# Altium PCB pqm_v2_copia01.PcbDoc
Units mil, origin at the board's own origin, x right, y up, seen from the top; angles counter-clockwise.
Board outline 5393.7 x 3307.09 mil, 2 copper layers (Top Layer, Bottom Layer); 201 components, 141 nets, 786 pads, 24 vias.
Unrouted connection lines stored in the file: 311.
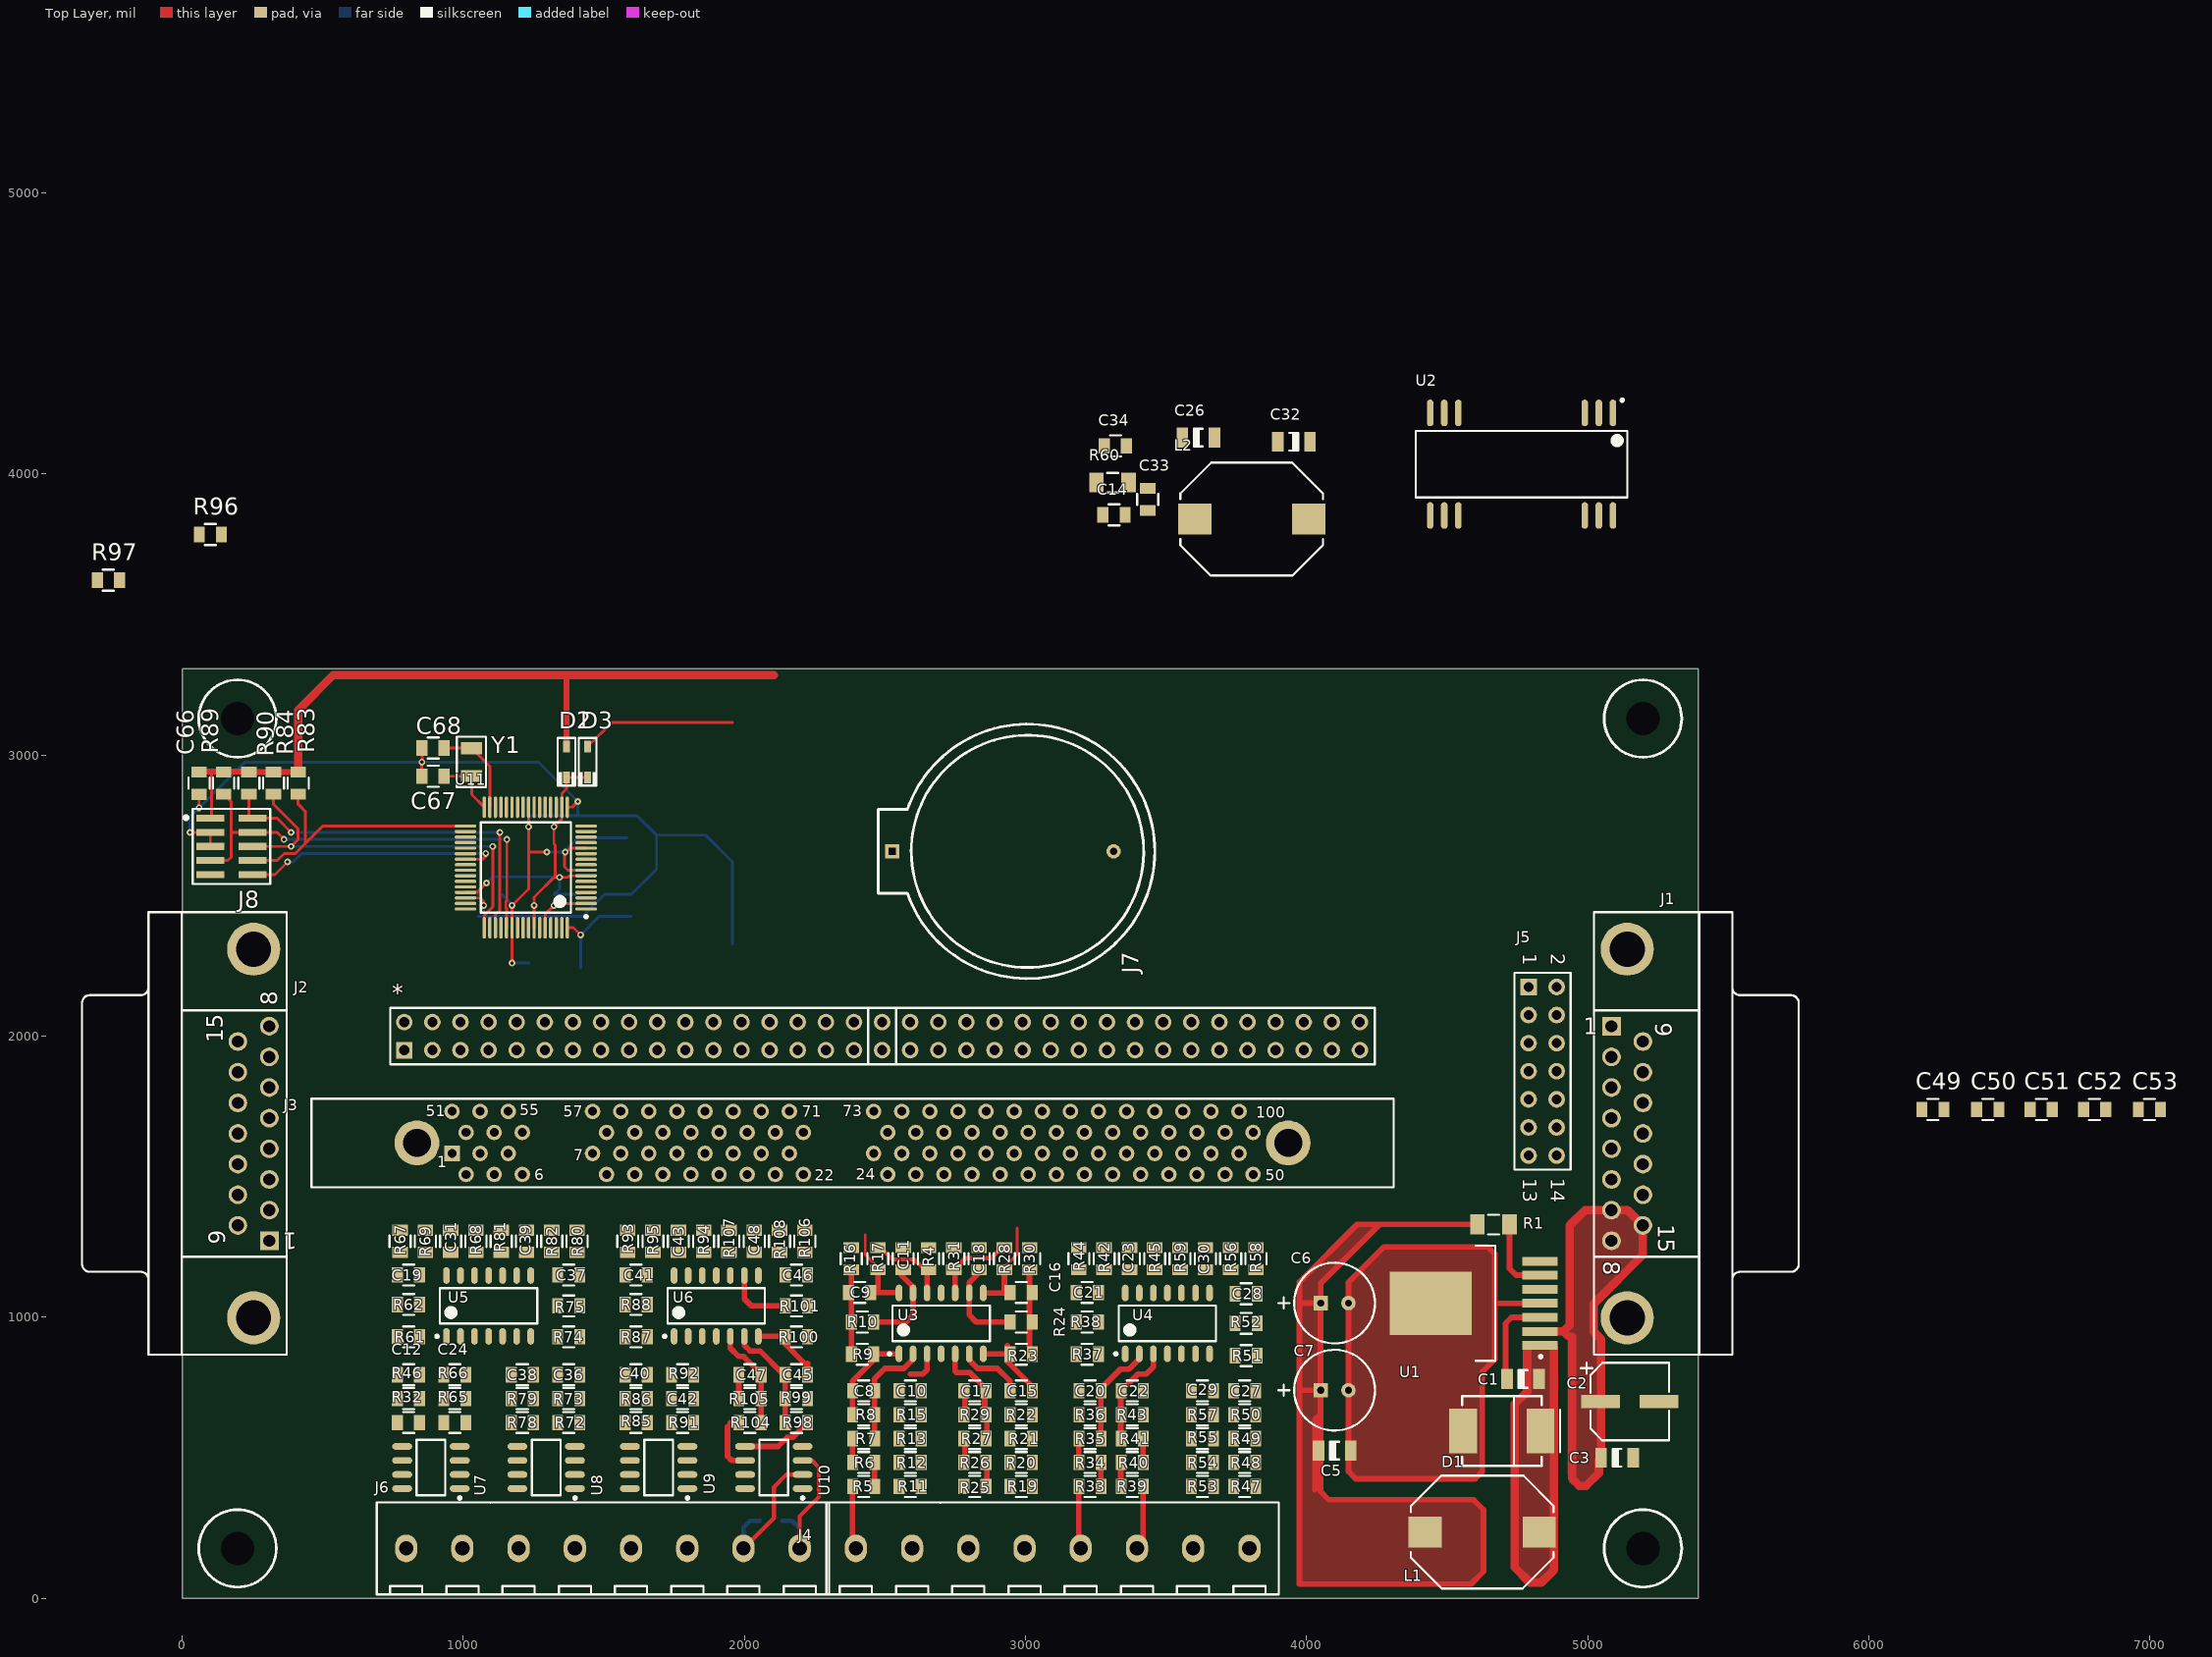
[diagram p0: Top Layer view]
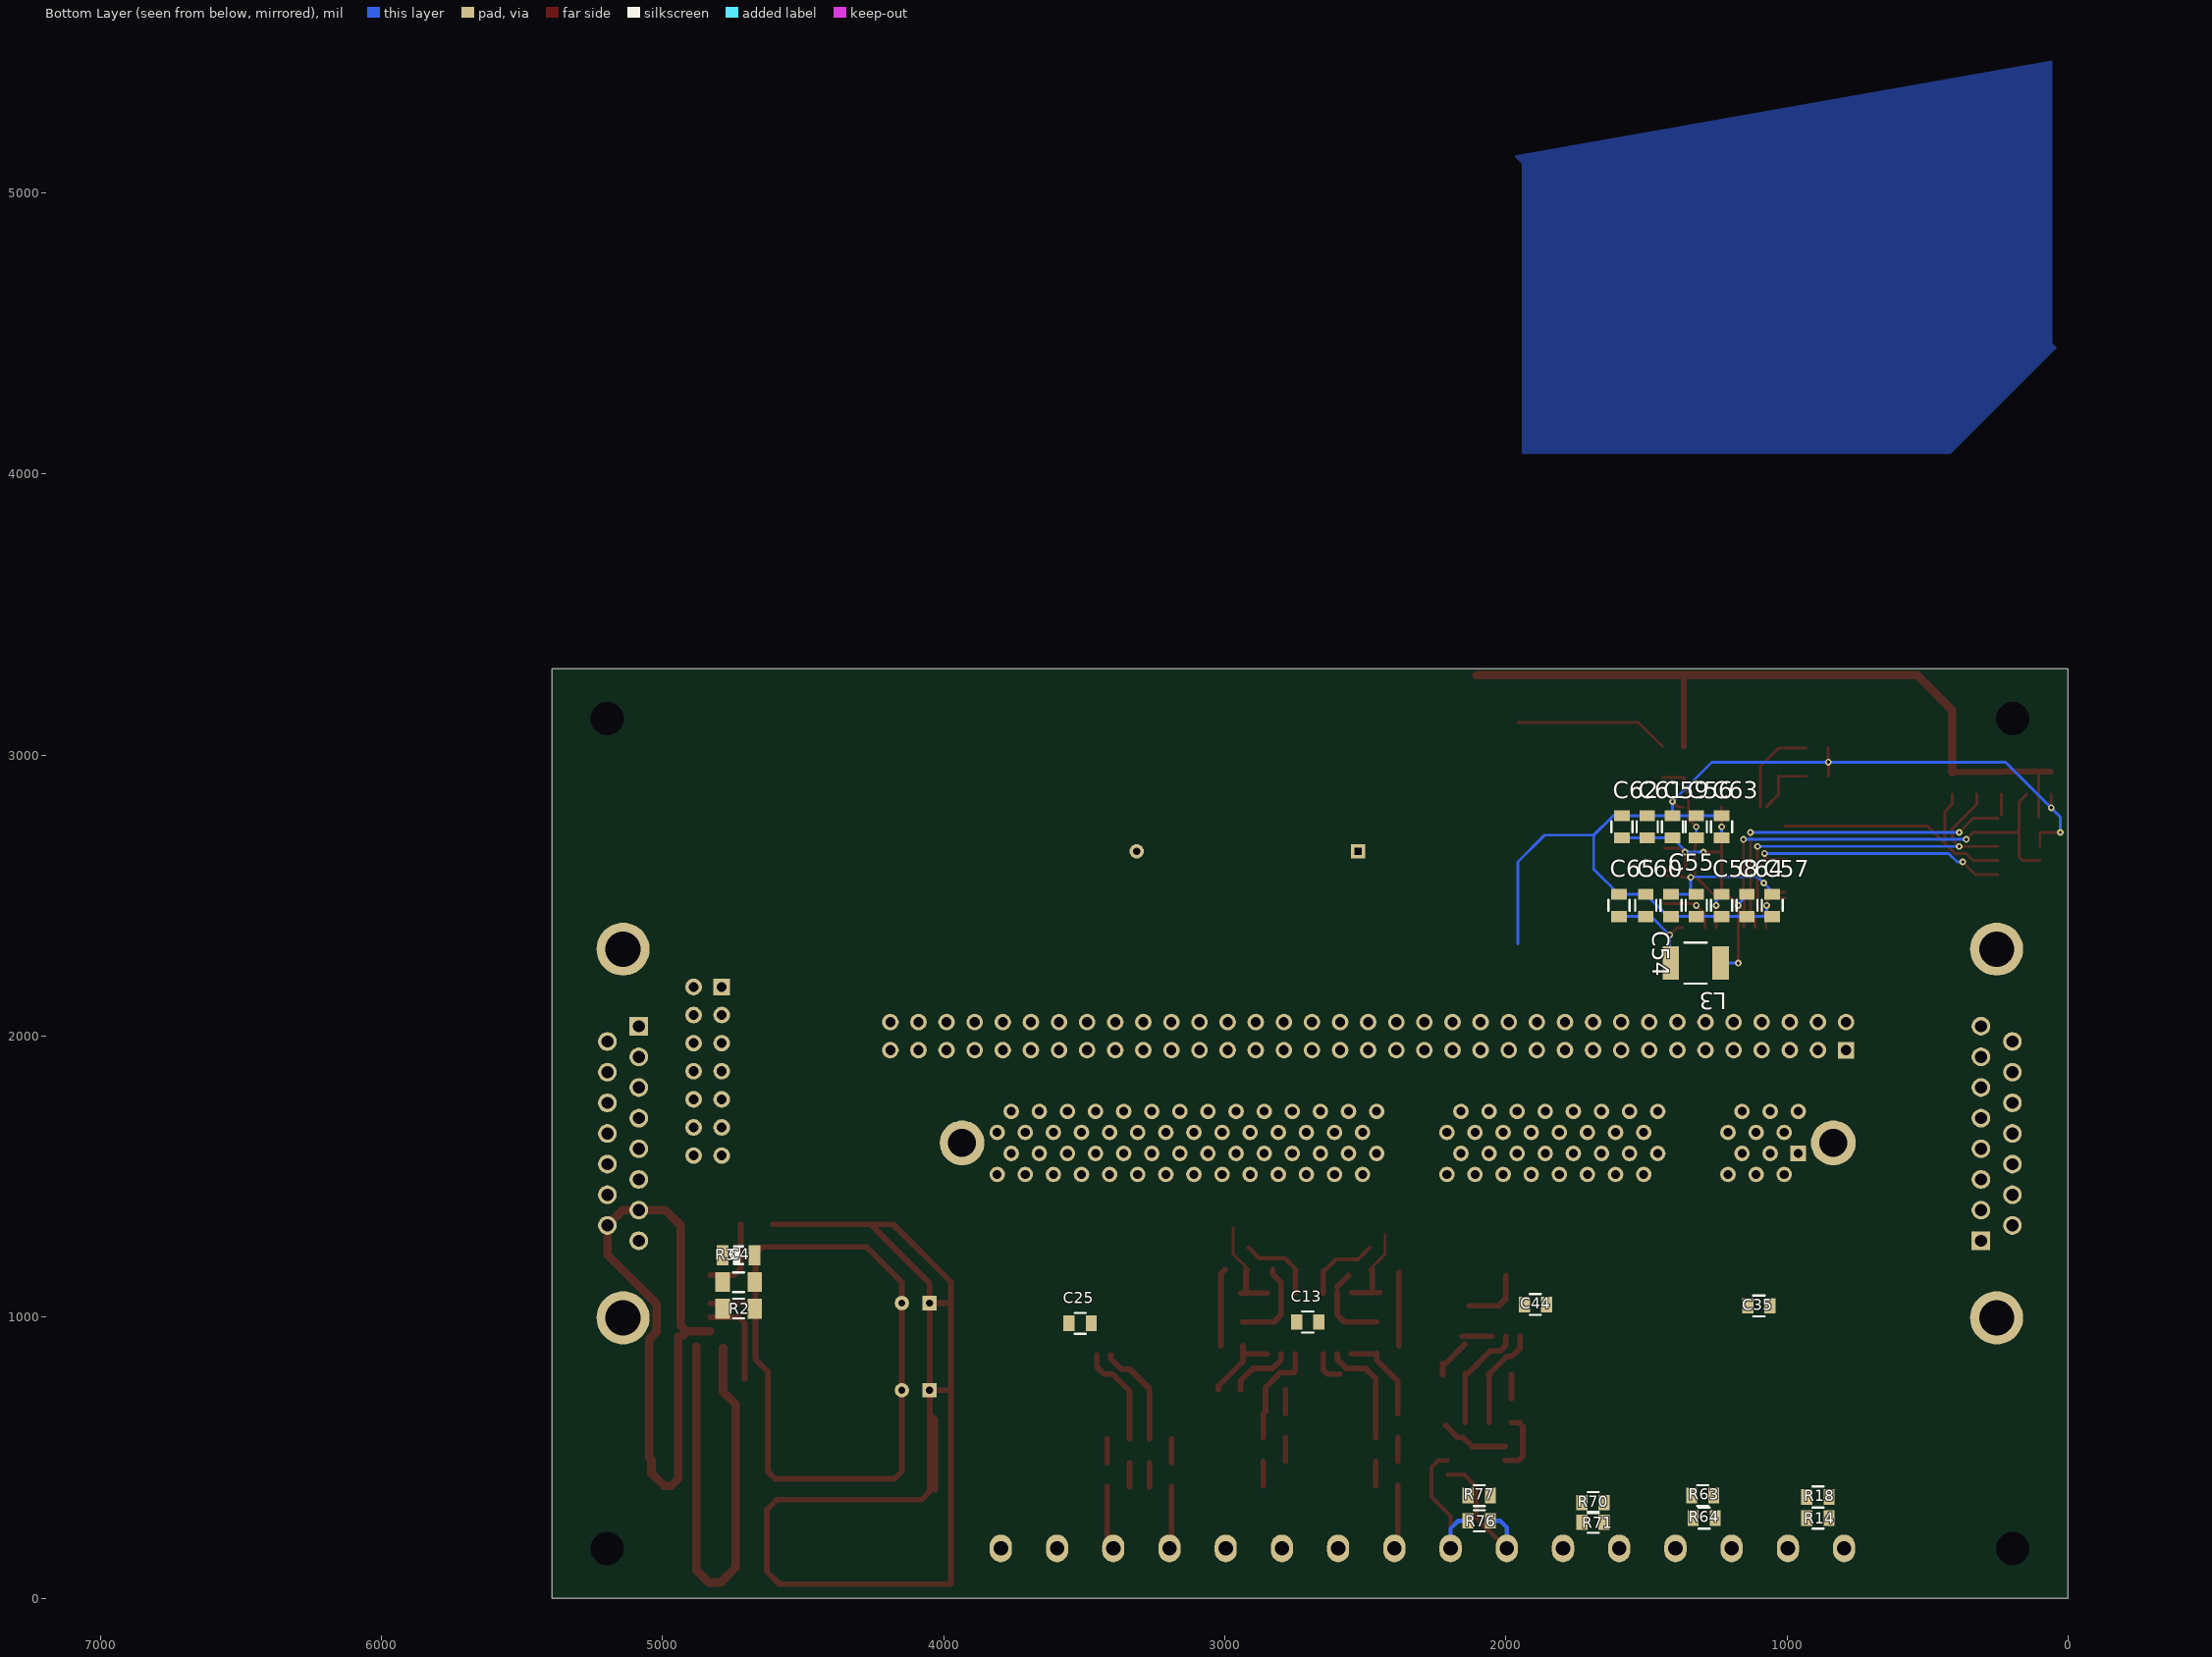
[diagram p1: Bottom Layer view, seen from below]

## Layer stack, top to bottom
Top Layer: signal copper 1.4
Dielectric: dielectric 12.6, FR-4, Dk 4.8
Bottom Layer: signal copper 1.4

## Board outline
0,0 0,3307.09 5393.7,3307.09 5393.7,0

## Design rules (kind name [scope] priority, off if disabled: settings)
Clearance [All] p1: gap=5
PlaneConnect [All] p1: planeconnectstyle=Direct reliefexpansion=20 reliefentries=4 reliefconductorwidth=10 reliefairgap=10
PolygonConnect [All] p1: connectstyle=Direct reliefconductorwidth=10 reliefentries=4 polygonreliefangle="90 Angle"
RoutingVias [All] p1: holewidth=15 width=30 viastyle="Through Hole" minholewidth=23.62 minwidth=11.81 maxholewidth=25 maxwidth=50
SilkscreenOverComponentPads [All] p1: minsilkscreentomaskgap=10
SolderMaskExpansion [All] p1: expansion=4
Width [All] p1: maxlimit=31.5 minlimit=10 preferedwidth=10
26 further rules are at their usual default settings.

## Classes and differential pairs
component class pqm_v2_page2: * C49 C50 C51 C52 C53 C54 C55 C56 C57 C58 C59 C60 C61 C62 C63 C64 C65 C66 C67 C68 D2 D3 J3 J5 J7 J8 L3 R83 R84 R89 R90 R96 R97 U11 Y1
component class pqm_v2_page4: C12 C19 C24 C31 C35 C36 C37 C38 C39 C40 C41 C42 C43 C44 C45 C46 C47 C48 J6 R14 R18 R32 R46 R61 R62 R63 R64 R65 R66 R67 R68 R69 R70 R71 R72 R73 R74 R75 R76 R77 R78 R79 R80 R81 R82 R85 R86 R87 R88 R91 R92 R93 R94 R95 R98 R99 R100 R101 R104 R105 R106 R107 R108 U5 U6 U7 U8 U9 U10
component class pqm_v2_page1: C1 C2 C3 C4 C5 C6 C7 C14 C26 C32 C33 C34 D1 J1 J2 L1 L2 R1 R2 R3 R60 U1 U2
component class pqm_v2_page3: C8 C9 C10 C11 C13 C15 C16 C17 C18 C20 C21 C22 C23 C25 C27 C28 C29 C30 J4 R4 R5 R6 R7 R8 R9 R10 R11 R12 R13 R15 R16 R17 R19 R20 R21 R22 R23 R24 R25 R26 R27 R28 R29 R30 R31 R33 R34 R35 R36 R37 R38 R39 R40 R41 R42 R43 R44 R45 R47 R48 R49 R50 R51 R52 R53 R54 R55 R56 R57 R58 R59 U3 U4

## Components (designator, comment, footprint, x,y, rotation, side; value= is the part's Value field where it differs from the comment)
* "CON_HeaderX70" HEADERX70 2490,2000 r0 top
C1 "CAP_C3216X7R2J103K115AA_TDK" CAPC3216X135N_B 4770,780 r0 top
C2 "CAP_EEE-1HA470XP_PANASONIC" CAPAE630770X770N 5150,700 r180 top
C3 "CAP_C3216X7R1E105M085AA_TDK" CAPC3216X135N_B 5105,500 r0 top
C4 "CAP_C3216X7R1E105M085AA_TDK" CAPC3216X135N_B 4730,1220 r180 bottom
C5 "CAP_EEU-FC1E121_PANASONIC" CAPPRD250W50D630H1250 4100,740 r270 top
C6 "CAP_EEU-FC1E121_PANASONIC" CAPPRD250W50D630H1250 4100,1050 r270 top
C7 "CAP_C3216X7R1E105M085AA_TDK" CAPC3216X135N_B 4100,525 r0 top
C8 "cap" CAPC2013X110N 2425,737.83 r180 top
C9 "cap" CAPC2013X110N 2410,1087.83 r180 top
C10 "cap" CAPC2013X110N 2590,737.83 r0 top
C11 "cap" CAPC2013X110N 2565,1207.83 r270 top
C12 "cap" CAPC2013X110N 805,795 r180 top
C13 "cap" CAPC2013X110N 2705,982.83 r0 bottom
C14 "cap" CAPC2013X110N 3315,3855 r0 top
C15 "cap" CAPC2013X110N 2985,737.83 r0 top
C16 "cap" CAPC2013X110N 2985,1087.83 r0 top
C17 "cap" CAPC2013X110N 2820,737.83 r180 top
C18 "cap" CAPC2013X110N 2835,1207.83 r270 top
C19 "cap" CAPC2013X110N 805,1150 r180 top
C20 "cap" CAPC2013X110N 3230,737.83 r180 top
C21 "cap" CAPC2013X110N 3220,1087.83 r180 top
C22 "cap" CAPC2013X110N 3380,737.83 r0 top
C23 "cap" CAPC2013X110N 3370,1207.83 r270 top
C24 "cap" CAPC2013X110N 970,795 r0 top
C25 "cap" CAPC2013X110N 3515,977.83 r180 bottom
C26 "CAP_C3216X7R1E105M085AA_TDK" CAPC3216X135N_B 3615,4130 r0 top
C27 "cap" CAPC2013X110N 3780,737.83 r0 top
C28 "cap" CAPC2013X110N 3785,1082.83 r0 top
C29 "cap" CAPC2013X110N 3630,737.83 r180 top
C30 "cap" CAPC2013X110N 3640,1207.83 r270 top
C31 "cap" CAPC2013X110N 955,1270 r270 top
C32 "CAP_C3216X7R1E105M085AA_TDK" CAPC3216X135N_B 3955,4115 r180 top
C33 "cap" CAPC2013X110N 3435,3910 r90 top
C34 "cap" CAPC2013X110N 3320,4100 r180 top
C35 "cap" CAPC2013X110N 1100,1040 r180 bottom
C36 "cap" CAPC2013X110N 1375,795 r0 top
C37 "cap" CAPC2013X110N 1375,1150 r0 top
C38 "cap" CAPC2013X110N 1210,795 r180 top
C39 "cap" CAPC2013X110N 1225,1270 r270 top
C40 "cap" CAPC2013X110N 1615,795 r180 top
C41 "cap" CAPC2013X110N 1615,1150 r180 top
C42 "cap" CAPC2013X110N 1780,710 r0 top
C43 "cap" CAPC2013X110N 1765,1270 r270 top
C44 "cap" CAPC2013X110N 1895,1045 r180 bottom
C45 "cap" CAPC2013X110N 2185,795 r0 top
C46 "cap" CAPC2013X110N 2185,1150 r0 top
C47 "cap" CAPC2013X110N 2020,795 r180 top
C48 "cap" CAPC2013X110N 2035,1270 r270 top
C49 "CAP_CC0805KRX7R8BB104_YAGEO" CAPC2013X110N 6228.74,1739.06 r0 top
C50 "CAP_CC0805KRX7R8BB104_YAGEO" CAPC2013X110N 6423.74,1739.06 r0 top
C51 "CAP_CC0805KRX7R8BB104_YAGEO" CAPC2013X110N 6613.74,1739.06 r0 top
C52 "CAP_CC0805KRX7R8BB104_YAGEO" CAPC2013X110N 6803.74,1739.06 r0 top
C53 "CAP_CC0805KRX7R8BB104_YAGEO" CAPC2013X110N 6998.74,1739.06 r0 top
C54 "CAP_C2012X6S1C106K085AC_TDK" CAPC2013X110N 1412.5,2465 r270 bottom
C55 "CAP_CC0805KRX7R8BB104_YAGEO" CAPC2013X110N 1322.5,2465 r270 bottom
C56 "CAP_CC0805KRX7R8BB104_YAGEO" CAPC2013X110N 1322.5,2745 r90 bottom
C57 "CAP_CC0805KRX7R8BB104_YAGEO" CAPC2013X110N 1052.5,2465 r270 bottom
C58 "CAP_CC0805KRX7R8BB104_YAGEO" CAPC2013X110N 1232.5,2465 r270 bottom
C59 "CAP_C2012X6S1C106K085AC_TDK" CAPC2013X110N 1407.5,2745 r90 bottom
C60 "CAP_C2012X6S1C106K085AC_TDK" CAPC2013X110N 1502.5,2465 r90 bottom
C61 "CAP_CC0805KRX7R8BB104_YAGEO" CAPC2013X110N 1497.5,2745 r270 bottom
C62 "CAP_CC0805KRX7R8BB104_YAGEO" CAPC2013X110N 1587.5,2745 r270 bottom
C63 "CAP_CC0805KRX7R8BB104_YAGEO" CAPC2013X110N 1232.5,2745 r270 bottom
C64 "CAP_CC0805KRX7R8BB104_YAGEO" CAPC2013X110N 1142.5,2465 r90 bottom
C65 "CAP_CC0805KRX7R8BB104_YAGEO" CAPC2013X110N 1597.5,2465 r270 bottom
C66 "CAP_CC0805KRX7R8BB104_YAGEO" CAPC2013X110N 60,2900 r270 top
C67 "CAP_C0805X150J5GACTU_KEMET" CAPC2013X110N 892.5,2925 r180 top
C68 "CAP_C0805X150J5GACTU_KEMET" CAPC2013X110N 892.5,3025 r180 top
D1 "DIO_SK36_MICROCOM" DIOM7959X262N 4695,595 r180 top
D2 "DIO_DB2J20900L_PANASONIC" SOD2512X097N 1367.5,2975 r90 top
D3 "DIO_DB2J20900L_PANASONIC" SOD2512X097N 1442.5,2975 r90 top
J1 "CON_DB_15" 788757-1 5515,1653.54 r270 top
J2 "CON_DB_15" 788757-1 -120,1653.54 r90 top
J3 "DIM 100 - F28335" DIMM1.27-2V100 2385,1620 r0 top
J4 "HeaderX8" BorneraX8 2396.85,177.17 r0 top
J5 "CON_DSP_JTAG" HDR2X7 4790,2175 r270 top
J6 "HeaderX8" BorneraX8 796.85,177.17 r0 top
J7 "CON_BAT" CON_BAT_2032 3007.5,2657.5 r180 top
J8 "CON_20021121-00010C4LF_FCI" FCI_20021121-00010C4LF 175,2675 r0 top
L1 "MAG_SRR1005-100M_BOURNS" MAG_INDUCTOR2A 4625,235 r180 top
L2 "MAG_SRR1005-100M_BOURNS" MAG_INDUCTOR2A 3805,3840 r0 top
L3 "MAG_CM453232-100KLCT_BOURNS" INDC4532X170N 1325,2260 r0 bottom
R1 "RES_ERJ-8ENF2551V_Panasonic" RESC3216N 4665,1330 r0 top
R2 "RES_ERJ-8GEYJ822V_Panasonic" RESC3216N 4730,1030 r0 bottom
R3 "RES_ERJ-8ENF7321V_Panasonic" RESC3216N 4730,1125 r180 bottom
R4 "Res" RESC2013X065BN 2655,1207.83 r90 top
R5 "Res" RESC2013X065BN 2425,397.83 r180 top
R6 "Res" RESC2013X065BN 2425,482.83 r0 top
R7 "Res" RESC2013X065BN 2425,567.83 r180 top
R8 "Res" RESC2013X065BN 2425,652.83 r0 top
R9 "Res" RESC2013X065BN 2420,867.83 r0 top
R10 "Res" RESC2013X065BN 2420,982.83 r180 top
R11 "Res" RESC2013X065BN 2590,397.83 r0 top
R12 "Res" RESC2013X065BN 2590,482.83 r180 top
R13 "Res" RESC2013X065BN 2590,567.83 r0 top
R14 "Res" RESC2013X065BN 890,285 r0 bottom
R15 "Res" RESC2013X065BN 2590,652.83 r0 top
R16 "Res" RESC2013X065BN 2380,1207.83 r90 top
R17 "Res" RESC2013X065BN 2475,1207.83 r270 top
R18 "Res" RESC2013X065BN 890,360 r0 bottom
R19 "Res" RESC2013X065BN 2985,397.83 r0 top
R20 "Res" RESC2013X065BN 2985,482.83 r180 top
R21 "Res" RESC2013X065BN 2985,567.83 r0 top
R22 "Res" RESC2013X065BN 2985,652.83 r180 top
R23 "Res" RESC2013X065BN 2985,867.83 r180 top
R24 "Res" RESC2013X065BN 2985,982.83 r0 top
R25 "Res" RESC2013X065BN 2820,397.83 r180 top
R26 "Res" RESC2013X065BN 2820,482.83 r0 top
R27 "Res" RESC2013X065BN 2820,567.83 r180 top
R28 "Res" RESC2013X065BN 2925,1207.83 r90 top
R29 "Res" RESC2013X065BN 2820,652.83 r180 top
R30 "Res" RESC2013X065BN 3015,1207.83 r90 top
R31 "Res" RESC2013X065BN 2745,1207.83 r90 top
R32 "Res" RESC2013X065BN 805,625 r180 top
R33 "Res" RESC2013X065BN 3230,397.83 r180 top
R34 "Res" RESC2013X065BN 3230,482.83 r0 top
R35 "Res" RESC2013X065BN 3230,567.83 r180 top
R36 "Res" RESC2013X065BN 3230,652.83 r0 top
R37 "Res" RESC2013X065BN 3220,867.83 r0 top
R38 "Res" RESC2013X065BN 3220,982.83 r180 top
R39 "Res" RESC2013X065BN 3380,397.83 r0 top
R40 "Res" RESC2013X065BN 3380,482.83 r180 top
R41 "Res" RESC2013X065BN 3380,567.83 r0 top
R42 "Res" RESC2013X065BN 3280,1207.83 r90 top
R43 "Res" RESC2013X065BN 3380,652.83 r0 top
R44 "Res" RESC2013X065BN 3190,1207.83 r90 top
R45 "Res" RESC2013X065BN 3460,1207.83 r90 top
R46 "Res" RESC2013X065BN 805,710 r0 top
R47 "Res" RESC2013X065BN 3780,397.83 r0 top
R48 "Res" RESC2013X065BN 3780,482.83 r180 top
R49 "Res" RESC2013X065BN 3780,567.83 r0 top
R50 "Res" RESC2013X065BN 3780,652.83 r180 top
R51 "Res" RESC2013X065BN 3785,862.83 r180 top
R52 "Res" RESC2013X065BN 3785,977.83 r0 top
R53 "Res" RESC2013X065BN 3630,397.83 r180 top
R54 "Res" RESC2013X065BN 3630,482.83 r0 top
R55 "Res" RESC2013X065BN 3630,567.83 r180 top
R56 "Res" RESC2013X065BN 3730,1207.83 r90 top
R57 "Res" RESC2013X065BN 3630,652.83 r180 top
R58 "Res" RESC2013X065BN 3820,1207.83 r90 top
R59 "Res" RESC2013X065BN 3550,1207.83 r90 top
R60 "RES_RC1206FR-0710KL_Yageo" RESC3216N 3310,3970 r0 top
R61 "Res" RESC2013X065BN 805,930 r0 top
R62 "Res" RESC2013X065BN 805,1045 r180 top
R63 "Res" RESC2013X065BN 1300,365 r180 bottom
R64 "Res" RESC2013X065BN 1295,285 r0 bottom
R65 "Res" RESC2013X065BN 970,625 r0 top
R66 "Res" RESC2013X065BN 970,710 r0 top
R67 "Res" RESC2013X065BN 775,1270 r90 top
R68 "Res" RESC2013X065BN 1045,1270 r90 top
R69 "Res" RESC2013X065BN 865,1270 r270 top
R70 "Res" RESC2013X065BN 1690,340 r180 bottom
R71 "Res" RESC2013X065BN 1690,270 r0 bottom
R72 "Res" RESC2013X065BN 1375,625 r0 top
R73 "Res" RESC2013X065BN 1375,710 r180 top
R74 "Res" RESC2013X065BN 1375,930 r180 top
R75 "Res" RESC2013X065BN 1375,1040 r0 top
R76 "Res" RESC2013X065BN 2095,275.32 r0 bottom
R77 "Res" RESC2013X065BN 2095,365 r180 bottom
R78 "Res" RESC2013X065BN 1210,625 r180 top
R79 "Res" RESC2013X065BN 1210,710 r180 top
R80 "Res" RESC2013X065BN 1405,1270 r90 top
R81 "Res" RESC2013X065BN 1135,1270 r90 top
R82 "Res" RESC2013X065BN 1315,1270 r90 top
R83 "RES_AC0805JR-07100KL_YAGEO" RESC2013X065BN 412.5,2900 r90 top
R84 "RES_AC0805JR-07100KL_YAGEO" RESC2013X065BN 325,2900 r90 top
R85 "Res" RESC2013X065BN 1615,625 r180 top
R86 "Res" RESC2013X065BN 1615,710 r0 top
R87 "Res" RESC2013X065BN 1615,930 r0 top
R88 "Res" RESC2013X065BN 1615,1045 r180 top
R89 "RES_AC0805JR-07100KL_YAGEO" RESC2013X065BN 147.5,2900 r90 top
R90 "RES_AC0805JR-07100KL_YAGEO" RESC2013X065BN 237.5,2900 r90 top
R91 "Res" RESC2013X065BN 1780,625 r0 top
R92 "Res" RESC2013X065BN 1780,795 r0 top
R93 "Res" RESC2013X065BN 1585,1270 r90 top
R94 "Res" RESC2013X065BN 1855,1270 r90 top
R95 "Res" RESC2013X065BN 1675,1270 r90 top
R96 "RES_RC0805JR-0710KL_YAGEO" RESC2013X065BN 100,3785 r0 top
R97 "RES_RC0805JR-0710KL_YAGEO" RESC2013X065BN -262.5,3622.5 r0 top
R98 "Res" RESC2013X065BN 2185,625 r0 top
R99 "Res" RESC2013X065BN 2185,710 r180 top
R100 "Res" RESC2013X065BN 2185,930 r180 top
R101 "Res" RESC2013X065BN 2185,1040 r0 top
R104 "Res" RESC2013X065BN 2020,625 r180 top
R105 "Res" RESC2013X065BN 2020,710 r180 top
R106 "Res" RESC2013X065BN 2215,1270 r90 top
R107 "Res" RESC2013X065BN 1945,1270 r90 top
R108 "Res" RESC2013X065BN 2125,1270 r90 top
U1 "IC_LM22673TJ-ADJ" TJ7A_N 4595,1049.13 r180 top
U2 "IC_DCR010503U_TI" SOP28 4765,4042.5 r270 top
U3 "IC_TLV2474_ANALOG" SOIC127P600-14AN 2700,977.83 r90 top
U4 "IC_TLV2474_ANALOG" SOIC127P600-14AN 3505,977.83 r90 top
U5 "IC_TLV2474_ANALOG" SOIC127P600-14AN 1090,1040 r90 top
U6 "IC_TLV2474_ANALOG" SOIC127P600-14AN 1900,1040 r90 top
U7 "IC_INA121U" SOIC127P600-8BN 885,465 r180 top
U8 "IC_INA121U" SOIC127P600-8BN 1295,465 r180 top
U9 "IC_INA121U" SOIC127P600-8BN 1695,465 r180 top
U10 "IC_INA121U" SOIC127P600-8BN 2105,465 r180 top
U11 "IC_ATSAM4S8BA-AU_ATMEL" TQFP50P1000X1000X160-64N 1222.5,2600 r180 top
Y1 "MSC_ECS-.327-12.5-34S-TR_ECS" XTAL3215X090N 1030,2975 r90 top

## Footprints (in the part's own frame and the unit in brackets; to place one, negate y for a bottom-side part, rotate by r counter-clockwise, add the part's x,y. Pads: shape width x height; smd on the part's side, far side on the other; paste and mask are expansions set on the pad)
788757-1 [mm] "Connector; D Subminiature AMPLIMITE 2000; 15 Position; Right Angle"
  rect 1.69x1.69 hole 1.09: 1(-9.695,-10.92)
  round 1.69 hole 1.09: 2(-6.925,-10.92) 3(-4.155,-10.92) 4(-1.385,-10.92) 5(1.385,-10.92) 6(4.155,-10.92) 7(6.925,-10.92) 8(9.695,-10.92) 9(-8.31,-8.08) 10(-5.54,-8.08) 11(-2.77,-8.08) 12(0,-8.08) 13(2.77,-8.08) 14(5.54,-8.08) 15(8.31,-8.08)
  round 4.8 hole 3.18: 16(-16.66,-9.5) 17(16.66,-9.5)
  silkscreen extent -20,-12.5 20,6
BorneraX8 [mm]
  oval 2x2.5 hole 1.3: 1(0,0) 2(5.08,0) 3(10.16,0) 4(15.24,0) 5(20.32,0) 6(25.4,0) 7(30.48,0) 8(35.56,0)
  silkscreen extent -2.66,-4.15 38.22,4.15, body extent -3.11,-4.05 38.1,4.05, height 10
CAPAE630770X770N [mm] "SMD Aluminum Electrolytic Capacitor; Body: 6.3x7.7 mm (DxL) // Source: UD series, Nichicon"
  rect 3.5x1.2 smd: 1(2.65,0) 2(-2.65,0)
  silkscreen extent -3.55,-3.5 4.4,3.5, body extent -3.65,-3.3 3.65,3.3, height 7.7
CAPC2013X110N [mm] "Chip Capacitor, 0805, Body 2.0x1.3mm, IPC Medium Density"
  rect 1x1.4 smd: 1(-1,0) 2(1,0)
  silkscreen extent -0.5,-0.95 0.5,0.95, body extent -1,-0.62 1,0.63, height 0.6
CAPC3216X135N_B [mm] "Chip Capacitor, 1206, UL840 2mm, Body 3.2x1.6mm, IPC Medium Density"
  rect 1.05x1.8 smd: 1(-1.45,0) 2(1.45,0)
  silkscreen extent -0.4,-0.8 0.4,0.8, body extent -1.6,-0.8 1.6,0.8, height 0.79
CAPPRD250W50D630H1250 [mm] "Capacitor, Polarized Radial Diameter, 2.5 Lead Spacing, 0.5 Lead Width, 6.3 Diameter, 12.5 Height"
  rect 1.3x1.3 hole 0.65: 1(0,-1.25)
  round 1.3 hole 0.65: 2(0,1.25)
  silkscreen extent -3.65,-5.1 3.65,3.65, body extent -3.18,-3.18 3.18,3.18, height 13.03
CON_BAT_2032 [mm]
  rect 1.3x1.3 hole 0.65 square: 1(12.223,0)
  round 1.3 hole 0.65: 2(-7.778,0)
  silkscreen extent -11.5,-11.5 13.51,11.5, body extent -11.44,-11 13.06,11, height 8.5
DIMM1.27-2V100 [mm] "Connector; DIMM II; 100 Position; Vertical"
  rect 1.4x1.4 hole 0.81: 1(-36.195,-0.95)
  round 1.4 hole 0.81: 2(-34.925,-2.85) 3(-33.655,-0.95) 4(-32.385,-2.85) 5(-31.115,-0.95) 6(-29.845,-2.85) 7(-23.495,-0.95) 8(-22.225,-2.85) 9(-20.955,-0.95) 10(-19.685,-2.85) 11(-18.415,-0.95) 12(-17.145,-2.85) 13(-15.875,-0.95) 14(-14.605,-2.85) 15(-13.335,-0.95) 16(-12.065,-2.85) 17(-10.795,-0.95) 18(-9.525,-2.85) 19(-8.255,-0.95) 20(-6.985,-2.85) 21(-5.715,-0.95) 22(-4.445,-2.85) 23(1.905,-0.95) 24(3.175,-2.85) 25(4.445,-0.95) 26(5.715,-2.85) 27(6.985,-0.95) 28(8.255,-2.85) 29(9.525,-0.95) 30(10.795,-2.85) 31(12.065,-0.95) 32(13.335,-2.85) 33(14.605,-0.95) 34(15.875,-2.85) 35(17.145,-0.95) 36(18.415,-2.85) 37(19.685,-0.95) 38(20.955,-2.85) 39(22.225,-0.95) 40(23.495,-2.85) 41(24.765,-0.95) 42(26.035,-2.85) 43(27.305,-0.95) 44(28.575,-2.85) 45(29.845,-0.95) 46(31.115,-2.85) 47(32.385,-0.95) 48(33.655,-2.85) 49(34.925,-0.95) 50(36.195,-2.85) 51(-36.195,2.85) 52(-34.925,0.95) 53(-33.655,2.85) 54(-32.385,0.95) 55(-31.115,2.85) 56(-29.845,0.95) 57(-23.495,2.85) 58(-22.225,0.95) 59(-20.955,2.85) 60(-19.685,0.95) 61(-18.415,2.85) 62(-17.145,0.95) 63(-15.875,2.85) 64(-14.605,0.95) 65(-13.335,2.85) 66(-12.065,0.95) 67(-10.795,2.85) 68(-9.525,0.95) 69(-8.255,2.85) 70(-6.985,0.95) 71(-5.715,2.85) 72(-4.445,0.95) 73(1.905,2.85) 74(3.175,0.95) 75(4.445,2.85) 76(5.715,0.95) 77(6.985,2.85) 78(8.255,0.95) 79(9.525,2.85) 80(10.795,0.95) 81(12.065,2.85) 82(13.335,0.95) 83(14.605,2.85) 84(15.875,0.95) 85(17.145,2.85) 86(18.415,0.95) 87(19.685,2.85) 88(20.955,0.95) 89(22.225,2.85) 90(23.495,0.95) 91(24.765,2.85) 92(26.035,0.95) 93(27.305,2.85) 94(28.575,0.95) 95(29.845,2.85) 96(31.115,0.95) 97(32.385,2.85) 98(33.655,0.95) 99(34.925,2.85) 100(36.195,0.95)
  round 4.04 hole 2.54: 101(-39.365,0) 102(39.365,0)
  silkscreen extent -48.9,-4 48.9,4, body extent -48.9,-4 48.9,4, height 23.82
DIOM7959X262N [mm] "Molded Diode, JEDEC DO-214AB (SMC), 7.9mmX5.9mm"
  rect 2.5x4 smd: 1(-3.5,0) 2(3.5,0)
  silkscreen extent -5.25,-3.15 3.6,3.15, body extent -3.98,-2.95 3.97,2.95, height 2.3
FCI_20021121-00010C4LF [mil] "CONNECTOR, MICRO TERMINAL STRIP, 10POS, 2ROW, 1.27MM"
  rect 100x25 smd: 1(-75,100) 2(75,100) 3(-75,50) 4(75,50) 5(-75,0) 6(75,0) 7(-75,-50) 8(75,-50) 9(-75,-100) 10(75,-100)
  silkscreen extent -163,-133 138,133, body extent -108,-125 108,125, height 176
HDR2X7 [mm]
  rect 1.5x1.5 hole 0.9: 1(0,0)
  round 1.5 hole 0.9: 2(0,2.54) 3(2.54,0) 4(2.54,2.54) 5(5.08,0) 6(5.08,2.54) 7(7.62,0) 8(7.62,2.54) 9(10.16,0) 10(10.16,2.54) 11(12.7,0) 12(12.7,2.54) 13(15.24,0) 14(15.24,2.54)
  silkscreen extent -1.27,-1.27 16.51,3.81, body extent -1.27,-1.27 16.51,3.81, height 9.27
HEADERX70 [mm]
  rect 1.5x1.5 hole 0.9: 1(-43.18,-1.27)
  round 1.5 hole 0.9: 2(-43.18,1.27) 3(-40.64,-1.27) 4(-40.64,1.27) 5(-38.1,-1.27) 6(-38.1,1.27) 7(-35.56,-1.27) 8(-35.56,1.27) 9(-33.02,-1.27) 10(-33.02,1.27) 11(-30.48,-1.27) 12(-30.48,1.27) 13(-27.94,-1.27) 14(-27.94,1.27) 15(-25.4,-1.27) 16(-25.4,1.27) 17(-22.86,-1.27) 18(-22.86,1.27) 19(-20.32,-1.27) 20(-20.32,1.27) 21(-17.78,-1.27) 22(-17.78,1.27) 23(-15.24,-1.27) 24(-15.24,1.27) 25(-12.7,-1.27) 26(-12.7,1.27) 27(-10.16,-1.27) 28(-10.16,1.27) 29(-7.62,-1.27) 30(-7.62,1.27) 31(-5.08,-1.27) 32(-5.08,1.27) 33(-2.54,-1.27) 34(-2.54,1.27) 35(0,-1.27) 36(0,1.27) 37(2.54,-1.27) 38(2.54,1.27) 39(5.08,-1.27) 40(5.08,1.27) 41(7.62,-1.27) 42(7.62,1.27) 43(10.16,-1.27) 44(10.16,1.27) 45(12.7,-1.27) 46(12.7,1.27) 47(15.24,-1.27) 48(15.24,1.27) 49(17.78,-1.27) 50(17.78,1.27) 51(20.32,-1.27) 52(20.32,1.27) 53(22.86,-1.27) 54(22.86,1.27) 55(25.4,-1.27) 56(25.4,1.27) 57(27.94,-1.27) 58(27.94,1.27) 59(30.48,-1.27) 60(30.48,1.27) 61(33.02,-1.27) 62(33.02,1.27) 63(35.56,-1.27) 64(35.56,1.27) 65(38.1,-1.27) 66(38.1,1.27) 67(40.64,-1.27) 68(40.64,1.27) 69(43.18,-1.27) 70(43.18,1.27)
  silkscreen extent -44.45,-2.54 44.51,2.54
INDC4532X170N [mm] "Chip Inductor, Body 4.5x3.2mm, IPC Medium Density"
  rect 1.5x3 smd: 1(-2.25,0) 2(2.25,0)
  silkscreen extent -1,-1.85 1,1.85, body extent -2.25,-1.6 2.25,1.6
MAG_INDUCTOR2A [mm] "Precision Wire Wound Inductor, 2-Leads, Body 12,7x10,0mm, IPC Medium Density"
  rect 3x2.8 smd: 1(-5.15,0) 2(5.15,0)
  silkscreen extent -6.45,-5.1 6.45,5.1, body extent -6.48,-5.15 6.5,5.1, height 5.2
RESC2013X065BN [mm] "Chip Resistor, 0805, Body 2.0x1.3mm, Pads modified for 1mm spacing."
  rect 1x1.4 smd: 1(-1,0) 2(1,0)
  silkscreen extent -0.5,-0.95 0.5,0.95, body extent -1,-0.62 1,0.63, height 0.45
RESC3216N [mm] "Chip Resistor, Body 3.2x1.6mm, IPC Medium Density"
  rect 1.3x1.8 smd: 1(-1.45,0) 2(1.45,0)
  silkscreen extent -0.5,-0.9 0.5,0.87, body extent -1.6,-0.8 1.6,0.8, height 0.55
SOD2512X097N [mm] "SOD-323, 2 Lead, Conforming to JEITA SC90 standard // Source: SOD-323 Package 2008, Fairchild"
  rect 1.05x0.65 smd: 1(-1.4,0) 2(1.4,0)
  silkscreen extent -2.15,-0.8 2.18,0.8, body extent -1.3,-0.67 1.3,0.68, height 1.1
SOIC127P600-8BN [mm] "SOIC, 8-Leads, Body 4.9x3.9mm, Pitch 1.27mm, IPC Medium Density"
  oval 1.8x0.6 smd: 1(-2.6,1.905) 2(-2.6,0.635) 3(-2.6,-0.635) 4(-2.6,-1.905) 5(2.6,-1.905) 6(2.6,-0.635) 7(2.6,0.635) 8(2.6,1.905)
  silkscreen extent -2.73,-2.5 1.3,2.88, body extent -3,-2.45 3,2.45, height 1.75
SOIC127P600-14AN [mm] "SOIC, 14-Leads, Body 8.6x3.9mm, Pitch 1.27mm, IPC Medium Density"
  oval 1.5x0.6 smd: 1(-2.75,3.81) 2(-2.75,2.54) 3(-2.75,1.27) 4(-2.75,0) 5(-2.75,-1.27) 6(-2.75,-2.54) 7(-2.75,-3.81) 8(2.75,-3.81) 9(2.75,-2.54) 10(2.75,-1.27) 11(2.75,0) 12(2.75,1.27) 13(2.75,2.54) 14(2.75,3.81)
  silkscreen extent -2.87,-4.4 1.6,4.78, body extent -3,-4.37 3,4.38, height 1.75
SOP28 [mm] "28-Pin Plastic Battery Snaphat Small Outline Package 1.27 mm Pitch"
  oval 2.4x0.6 smd: 1(-4.445,8.255) 2(-4.445,6.985) 3(-4.445,5.715) 12(-4.445,-5.715) 13(-4.445,-6.985) 14(-4.445,-8.255) 15(4.826,-8.255) 16(4.826,-6.985) 17(4.826,-5.715) 26(4.826,5.715) 27(4.826,6.985) 28(4.826,8.255)
  silkscreen extent -5.72,-9.55 3.19,9.55
TJ7A_N [mm] "D2-PAK, 8-Leads, Body 9.9x10.2mm, Pitch 1.27mm, Lead Span 14mm, IPC Medium Density"
  rect 3.2x0.8 smd: 1(-6,3.81) 2(-6,2.54) 3(-6,1.27) 4(-6,0) 5(-6,-1.27) 6(-6,-2.54) 7(-6,-3.81)
  rect 7.4x5.75 smd: 8(3.9,0)
  silkscreen extent -6.18,-5.2 -0.2,5.2, body extent -1.95,-5.2 8.15,5.2, height 2.1
TQFP50P1000X1000X160-64N [mm] "TQFP, 64-Leads, Body 10,00x10,00mm, Pitch 0,50mm, IPC Medium Density"
  oval 1.95x0.3 smd: 1(-5.45,3.75) 2(-5.45,3.25) 3(-5.45,2.75) 4(-5.45,2.25) 5(-5.45,1.75) 6(-5.45,1.25) 7(-5.45,0.75) 8(-5.45,0.25) 9(-5.45,-0.25) 10(-5.45,-0.75) 11(-5.45,-1.25) 12(-5.45,-1.75) 13(-5.45,-2.25) 14(-5.45,-2.75) 15(-5.45,-3.25) 16(-5.45,-3.75) 33(5.45,-3.75) 34(5.45,-3.25) 35(5.45,-2.75) 36(5.45,-2.25) 37(5.45,-1.75) 38(5.45,-1.25) 39(5.45,-0.75) 40(5.45,-0.25) 41(5.45,0.25) 42(5.45,0.75) 43(5.45,1.25) 44(5.45,1.75) 45(5.45,2.25) 46(5.45,2.75) 47(5.45,3.25) 48(5.45,3.75)
  oval 0.3x1.95 smd: 17(-3.75,-5.45) 18(-3.25,-5.45) 19(-2.75,-5.45) 20(-2.25,-5.45) 21(-1.75,-5.45) 22(-1.25,-5.45) 23(-0.75,-5.45) 24(-0.25,-5.45) 25(0.25,-5.45) 26(0.75,-5.45) 27(1.25,-5.45) 28(1.75,-5.45) 29(2.25,-5.45) 30(2.75,-5.45) 31(3.25,-5.45) 32(3.75,-5.45) 49(3.75,5.45) 50(3.25,5.45) 51(2.75,5.45) 52(2.25,5.45) 53(1.75,5.45) 54(1.25,5.45) 55(0.75,5.45) 56(0.25,5.45) 57(-0.25,5.45) 58(-0.75,5.45) 59(-1.25,5.45) 60(-1.75,5.45) 61(-2.25,5.45) 62(-2.75,5.45) 63(-3.25,5.45) 64(-3.75,5.45)
  silkscreen extent -5.58,-4.08 4.08,4.57, body extent -5.79,-5.79 5.79,5.79, height 1
XTAL3215X090N [mm] "Crystal, Body: 3.2mmm X 1.5mm"
  rect 1.1x1.9 smd: 1(-1.25,0) 2(1.25,0)
  silkscreen extent -2.25,-1.3 2.3,1.35, body extent -1.6,-0.75 1.6,0.75, height 0.9

## Part data
C1: "10000pF, 630 V, Capacitores cerámicos, X7R, 1206 (3216 métrico), 0.126\" L x 0.063\" A (3.20 mm x 1.60 mm)"
C2: "47µF 50V Aluminum Capacitors Radial, Can - SMD 2000 Hrs @ 85°C"
C3 C4 C7 C26 C32: "1 µF, 25 V, Capacitores cerámicos, X7R, 1206 (3216 métrico), 0.126\" L x 0.063\" A (3.20 mm x 1.60 mm)"
C5 C6: "120µF 25V Aluminum Capacitors Radial, Can 1000 Hrs @ 105°C"
C49 C50 C51 C52 C53 C55 C56 C57 C58 C61 C62 C63 C64 C65 C66: "CAP CER 0.1UF 25V 10% X7R 0805"
C54 C59 C60: "CAP CER 10UF 16V 10% X6S 0805"
C67 C68: "CAP CER 15PF 50V NP0 0805"
D1: "DIODE SCHOTTKY 60V 3A SMC"
D2 D3: "DIODE SCHOTTKY 20V 500MA SMINI2"
J1 J2: library part 788781-1, "Receptacle Assembly, 15 Position, Right Angle, 8.08mm Series, Amplimite, with Screwlocks"
J3: library part CON_DIM_100
J4 J6: library part CON_HeaderX8
J7: "HOLDER BATTERY COIN 20MM 1-CELL"
J8: "CONN HEADER 10POS DL UNSHRD SMD"
L1 L2 L3: "FIXED IND 10UH 2A 65 MOHM SMD"
R1: "RES SMD 2.55K OHM 1% 1/4W 1206"
R2: "RES SMD 8.2K OHM 5% 1/4W 1206"
R3: "RES SMD 7.32K OHM 1% 1/4W 1206"
R60: "RES SMD 10K OHM 1% 1/4W 1206"
R83 R84 R89 R90: "RES SMD 100K OHM 5% 1/8W 0805"
R96 R97: "RES SMD 10K OHM 5% 1/8W 0805"
U1: "3A SIMPLE SWITCHER® Step-Down Voltage Regulator with Adjustable Soft-Start and Current Limit, 7-pin TO-263 Thin"
U3 U4 U5 U6: "IC OPAMP GP 2.8MHZ RRO 14SOIC"
U7 U8 U9 U10: "FET-Input, Low Power Instrumentation Amplifier"
U11: "IC MCU 32BIT 512KB FLASH 64LQFP"
Y1: "CRYSTAL 32.7680KHZ 12.5PF SMD"

## Free pads (board coordinates)
  round 0 hole 118.11 unplated: 0(196.85,177.17) 0(196.85,3129.92) 0(5196.85,3129.92) 0(5196.85,177.17)

## Via types
v1: diameter 23.62, hole 11.81, Top Layer to Bottom Layer, 24 vias

## Nets (pads, with @x,y where several pads share a name; then routed paths per layer and width w, separated by ;. In a path a pad name is that pad's centre, name@x,y a point inside that pad or via, vN(x,y) a via of type N, cw(c..) or ccw(c..) an arc to the next point about the centre after c; other vN are vias at no path point)
3.3V_ISO: C14.1 C66.1 D2.2 J2.10 J3.1 J3.51 J8.1 R60.2 R83.2 R84.2 R89.2 R90.2 U2.14 | length 2728.5
  Top Layer w10: J8.1@105,2780 105,2941.24
  Top Layer w20: C66.1@62.5,2941.24 105,2941.24 R90.2@237.5,2941.24 ; R90.2 R84.2 R83.2 ; D2.2 1367.5,3282.5
  Top Layer w30: R83.2 412.5,3160 537.5,3285 2105,3285
+5V: C5.1 C6.1 C7.1 C26.1 C49.1 C50.1 C51.1 C52.1 C53.1 J1.6 J1.13 J1.14 J3.77 J3.82 J3.87 J3.92 J3.96 L1.2 L2.1 R1.1 | length 4763
  Top Layer w20: 3980,740 C5.1@4050,740 ; 3990,1050 C6.1 4050.79,1120.79 4260,1330 ; 4030,385 C7.1@4030,525 ; C7.1@4032.91,525 C7.1@4030,525 ; C5.1 C5.1@4050,740 ; C6.1@4055.79,1049.13 4050,1043.35 C5.1@4050,740 ; R1.1 4260,1330 ; C7.1@4030,525 4030,635 4050,655 ; 4050,655 C5.1@4050,740 ; 4050,655 4050,380 4080,350 4595,350 4630,315 4630,95 4585,50 3975,50 3975,1125 4180,1330 4260,1330
  Top Layer w30: C6.1 4060.79,1044.13 C6.1@4055.79,1049.13
+5V_A: C13.2 C25.2 C35.2 C44.2 J2.6 J2.13 J2.14 U3.4 U4.4 U5.4 U6.4 U7.7 U8.7 U9.7 U10.7
AGND: C2.2 C3.2 C4.2 C5.2 C6.2 C7.2 C11.1 C13.1 C18.1 C23.1 C25.1 C26.2 C30.1 C31.1 C32.2 C33.2 C35.1 C39.1 C43.1 C44.1 C48.1 C49.2 C50.2 C51.2 C52.2 C53.2 D1.2 J1.4 J1.5 J1.12 J2.4 J2.5 J2.12 J3.8 J3.10 J3.12 J3.14 J3.27 J3.37 J3.47 J3.58 J3.60 J3.62 J3.64 J5.4 J5.8 J5.10 J5.12 R2.1 R3.2 R4.2 R16.2 R30.2 R31.2 R44.2 R45.2 R58.2 R59.2 R67.2 R68.2 R80.2 R81.2 R93.2 R94.2 R106.2 R107.2 U1.4 U1.8 U2.26 U2.27 U3.11 U4.11 U5.11 U6.11 U7.4 U8.4 U9.4 U10.4 | length 2715.4
  Top Layer w20: C6.2@4154.21,1049.13 C6.2@4159.21,1044.13 ; U1.4 4670,1049.13 ; 4670,1049.13 4670,1225 4645,1250 4275,1250 4149.21,1124.21 C6.2 C5.2 4149.21,450.79 4175,425 4600,425 4625,450 4625,595 4625,805 4670,850 4670,1049.13
EARTH: J1.16 J1.17 J2.16 J2.17
EMU0: J3.100 J5.13
EMU1: J3.50 J5.14
GND_ISO: C14.2 C34.2 C54.2 C55.2 C56.2 C57.2 C58.2 C59.2 C60.2 C61.1 C62.1 C63.1 C64.1 C65.1 C66.2 C67.2 C68.2 J2.2 J3.6 J3.56 J7.2 J8.3 J8.5 J8.9 R96.1 R97.1 U2.13 U11.2 U11.17 U11.46 U11.60 | length 4164
  Top Layer w10: v1(27.5,2725) J8.3 J8.5 ; v1(60,2812.5) C66.2 ; C67.2@852.5,2925.63 v1(852.5,2975) 853.13,2975.63 C68.2 ; U11.46 1060.77,2491.73 1072.5,2480 v1(1072.5,2465) ; U11.60 1291.4,2433.9 v1(1322.5,2465) 1329.55,2472.05 U11.2 ; U11.17 1387.07,2814.57 v1(1407.5,2835)
  Bottom Layer w10: v1(27.5,2725) 27.5,2780 v1(60,2812.5) 222.5,2975 v1(852.5,2975) 1267.5,2975 v1(1407.5,2835) C59.2 ; C57.2 C58.2 C55.2 C54.2 1423.76,2425.63 C60.2 C65.1 1687.5,2594.37 1687.5,2715 ; 1072.5,2445.63 v1(1072.5,2465) ; C63.1 C61.1 C62.1 1618.13,2784.37 1687.5,2715 ; 1957.5,2328.8 1957.5,2620 1862.5,2715 1687.5,2715
NetC1_1: C1.1 U1.3 | length 330
  Top Layer w20: C1.1@4707.91,780 4707.91,977.91 4729.13,999.13 U1.3
NetC1_2: C1.2 D1.1 L1.1 U1.1 | length 1775.1
  Top Layer w30: U1.1@4785,890 4785,735 4740,690 4740,110 4795,55 4835,55 4880,100 U1.1@4880,895
NetC4_1: C4.1 U1.7
NetC8_1: C8.1 R7.1 R8.2 U3.2 | length 394.1
  Top Layer w20: R7.1@2463.11,571.89 2463.11,741.89 2463.11,780.94 2500,817.83 2567.89,817.83 2600,849.95 U3.2
NetC8_2: C8.2 R8.1 R9.2 U3.1 | length 338.5
  Top Layer w20: R8.1@2384.37,656.89 2384.37,741.89 2384.37,772.2 2459.37,847.2 2459.37,872.52 2462.32,869.57 U3.1
NetC9_1: C9.1 J3.61 R17.2 U3.14 | length 321.7
  Top Layer w10: 2430,1292.83 2430,1223.46 R17.2@2485,1168.46
  Top Layer w20: C9.1 U3.14@2548.27,1087.83 ; 2475,1092.83 R17.2
NetC9_2: C9.2 R9.1 R10.2 R16.1 | length 261.3
  Top Layer w20: 2380.63,897.83 R16.1@2380.63,1159.09
NetC10_1: C10.1 R13.1 R15.1 U3.3 | length 122.6
  Top Layer w20: 2590.31,797.83 2635,797.83 2650,812.83 U3.3
NetC10_2: C10.2 C17.2 C22.2 C24.2 C29.2 C38.2 C42.2 C47.2 R15.2 R29.2 R43.2 R57.2 R66.2 R79.2 R92.2 R105.2 | length 170
  Top Layer w20: R105.2 C47.2 ; R29.2@2784.37,656.89 C17.2@2784.37,741.89
NetC11_2: C11.2 R10.1 U3.13 | length 307.6
  Top Layer w10: U3.13 U3.13@2600,1107.83
  Top Layer w20: R10.1 2575,982.83 2600,1007.83 U3.13 ; 2560,1147.83 U3.13@2600,1107.83
NetC12_1: C12.1 R32.1 R46.2 U5.2
NetC12_2: C12.2 R46.1 R61.2 U5.1
NetC15_1: C15.1 R21.1 R22.2 U3.6 | length 228.5
  Top Layer w20: U3.6 2800,847.83 2830,817.83 2900,817.83 2944.37,773.46 C15.1@2944.37,741.89
NetC15_2: C15.2 R22.1 R23.2 U3.7 | length 277.4
  Top Layer w20: U3.7 R23.2@2935.18,869.57 ; 2935.63,897.83 2935.63,842.2 3023.11,754.72 C15.2@3023.11,741.89
NetC16_1: C16.1 J3.11 R28.1 U3.8 | length 347.8
  Top Layer w10: R28.1@2915,1168.46 2970,1223.46 2970,1317.2
  Top Layer w20: U3.8 C16.1@2943.9,1086.1 ; 2925,1086.1 R28.1
NetC16_2: C16.2 R23.1 R24.2 R30.1 | length 276.6
  Top Layer w20: R30.1@3000,1168.46 3014.37,1154.09 3014.37,897.83
NetC17_1: C17.1 R27.1 R29.1 U3.5 | length 372.2
  Top Layer w20: U3.5 2750,807.83 2755,802.83 2802.17,802.83 2855,750 2855,665 2863.11,656.89 R27.1@2863.11,571.89
NetC18_2: C18.2 R24.1 U3.9 | length 319
  Top Layer w20: C18.2@2830,1168.46 2830,1152.83 2800,1122.83 U3.9 2800,1007.83 2825,982.83 R24.1@2935.63,982.83
NetC19_1: C19.1 J3.57 R69.2 U5.14
NetC19_2: C19.2 R61.1 R62.2 R67.1
NetC20_1: C20.1 R35.1 R36.2 U4.2 | length 372.2
  Top Layer w20: R35.1@3268.11,566.89 3268.11,736.89 3268.11,745.35 3337.8,815.04 3368.18,815.04 3405,851.86 U4.2@3405,864.57
NetC20_2: C20.2 R36.1 R37.2 U4.1
NetC21_1: C21.1 J3.63 R42.1 U4.14
NetC21_2: C21.2 R37.1 R38.2 R44.1
NetC22_1: C22.1 R41.1 R43.1 U4.3 | length 363
  Top Layer w20: R41.1@3339.37,566.89 3339.37,651.89 3339.37,736.89 3400.31,797.83 3430,797.83 3455,822.83 U4.3@3455,864.57
NetC23_2: C23.2 R38.1 U4.13
NetC24_1: C24.1 R65.1 R66.1 U5.3
NetC27_1: C27.1 R49.1 R50.2 U4.6
NetC27_2: C27.2 R50.1 R51.2 U4.7
NetC28_1: C28.1 J3.13 R56.1 U4.8
NetC28_2: C28.2 R51.1 R52.2 R58.1
NetC29_1: C29.1 R55.1 R57.1 U4.5
NetC30_2: C30.2 R52.1 U4.9
NetC31_2: C31.2 R62.1 U5.13
NetC32_1: C32.1 C33.1 L2.2 U2.1 U2.2
NetC34_1: C34.1 U2.12 U2.17
NetC36_1: C36.1 R72.1 R73.2 U5.6
NetC36_2: C36.2 R73.1 R74.2 U5.7
NetC37_1: C37.1 J3.7 R82.1 U5.8
NetC37_2: C37.2 R74.1 R75.2 R80.1
NetC38_1: C38.1 R78.1 R79.1 U5.5
NetC39_2: C39.2 R75.1 U5.9
NetC40_1: C40.1 R85.1 R86.2 U6.2
NetC40_2: C40.2 R86.1 R87.2 U6.1
NetC41_1: C41.1 J3.59 R95.1 U6.14
NetC41_2: C41.2 R87.1 R88.2 R93.1
NetC42_1: C42.1 R91.1 R92.1 U6.3
NetC43_2: C43.2 R88.1 U6.13
NetC45_1: C45.1 R98.1 R99.2 U6.6 | length 383.4
  Top Layer w20: U6.6 2000,900 2020,880 2054.9,880 C45.1@2135.63,799.27 ; R98.1 C45.1 C45.1@2145.63,799.27
NetC45_2: C45.2 R99.1 R100.2 U6.7 | length 242.8
  Top Layer w20: U6.7 R100.2@2155,931.73 ; R100.2@2145.63,904.37 2214.37,835.63 ; C45.2 2224.37,835.63
NetC46_1: C46.1 J3.9 R108.1 U6.8
NetC46_2: C46.2 R100.1 R101.2 R106.1
NetC47_1: C47.1 R104.1 R105.1 U6.5 | length 365.5
  Top Layer w20: U6.5 1950,890 1980,860 1997.57,860 C47.1@2062.57,795 ; C47.1@2057.57,795 C47.1 R105.1 R104.1
NetC48_2: C48.2 R101.1 U6.9 | length 224.3
  Top Layer w20: U6.9 2000,1065 2025,1040 R101.1@2130.63,1040
NetC54_1: C54.1 C55.1 C56.1 C57.1 C58.1 D2.1 D3.1 U11.7 U11.18 U11.45 U11.58 | length 1408.7
  Top Layer w10: U11.45 1050,2511.42 1050,2512.5 v1(1082.5,2545) ; U11.58 v1(1252.03,2465) 1252.03,2494.53 1327.97,2570.47 1327.5,2570.95 1327.5,2680 1322.5,2685 v1(1322.5,2745) 1350.45,2772.95 U11.18 1350.45,2862.95 1367.5,2880 D2.1 D3.1 ; 1322.5,2565 v1(1342.5,2565) 1372.5,2565 1377.97,2570.47 U11.7
  Bottom Layer w10: C57.1 1052.5,2515 v1(1082.5,2545) 1104.31,2566.81 1340.69,2566.81 v1(1342.5,2565) 1342.5,2524.37 C55.1 C54.1 ; v1(1252.03,2465) C58.1@1252.03,2484.84 ; C56.1 v1(1322.5,2745)
NetC59_1: C59.1 C61.2 C62.2 C63.2 C64.2 L3.1 U11.8 U11.12 U11.24 U11.54 | length 1324.2
  Top Layer w10: v1(1173.29,2260) U11.54 v1(1173.29,2465) 1232.34,2524.06 1232.34,2655 ; U11.24 1232.34,2655 ; v1(1297.5,2655) 1232.34,2655 ; U11.8 1372.34,2590.16 1360,2602.5 1360,2647.5 1381.4,2668.9 U11.12
  Bottom Layer w10: C64.2@1137.5,2505 v1@1177.5,2465 ; v1(1173.29,2260) L3.1@1235,2260 ; C63.2 v1(1232.5,2745) ; v1(1297.5,2655) v1(1362.5,2655) 1362.5,2660.63 C59.1 C61.2 C62.2@1582.5,2705.63
NetC60_1: C60.1 C65.2 L3.2 U11.64 | length 382.6
  Top Layer w10: U11.64 1392.07,2385.43 v1(1417.5,2360)
  Bottom Layer w10: L3.2@1417.5,2242.5 v1(1417.5,2360) 1483.13,2425.63 C60.1 C65.2
NetC67_1: C67.1 U11.32 Y1.1 | length 228.3
  Top Layer w10: C67.1 1029.21,2925 Y1.1 1030,2859.43 U11.32
NetC68_1: C68.1 U11.31 Y1.2 | length 333.7
  Top Layer w10: C68.1 Y1.2@1029.21,3025 ; Y1.2 1094.55,2959.67 U11.31
NetD3_2: D3.2 J7.1 | length 550.7
  Top Layer w10: D3.2 1528.58,3116.2 1957.5,3116.2
NetJ1_1: J1.1 J3.43
NetJ1_9: J1.9 J3.93
NetJ2_1: J2.1 J3.52
NetJ2_9: J2.9 J3.2
NetJ4_1: J4.1 R5.2 | length 232.1
  Top Layer w20: R5.2@2384.37,401.89 2384.37,187.48 J4.1@2396.85,175
NetJ4_2: J4.2 R11.2
NetJ4_3: J4.3 R19.2
NetJ4_4: J4.4 R25.2
NetJ4_5: J4.5 R33.2 | length 214.4
  Top Layer w20: J4.5@3189.37,182.48 R33.2@3189.37,396.89
NetJ4_6: J4.6 R39.2 | length 230.7
  Top Layer w20: J4.6@3396.85,175 3418.11,196.26 R39.2@3418.11,396.89
NetJ4_7: J4.7 R47.2
NetJ4_8: J4.8 R53.2
NetJ6_1: J6.1 R14.1 U7.2
NetJ6_2: J6.2 R14.2 U7.3
NetJ6_3: J6.3 R63.1 U8.2
NetJ6_4: J6.4 R63.2 U8.3
NetJ6_5: J6.5 R70.1 U9.2
NetJ6_6: J6.6 R70.2 U9.3
NetJ6_7: J6.7 R76.1 U10.2 | length 526.8
  Top Layer w15: J6.7 2105,285.32 2105,395 2150,440 U10.2
  Bottom Layer w15: J6.7 1996.85,251.85 2020.31,275.31 R76.1
NetJ6_8: J6.8 R76.2 U10.3 | length 537.8
  Top Layer w15: J6.8@2187.83,177.17 J6.8 2196.85,291.85 2265,360 2265,465 2240,490 U10.3
  Bottom Layer w15: R76.2 2169.69,275.31 2196.85,248.15 J6.8
NetR1_2: R1.2 R3.1 U1.6 | length 276.1
  Top Layer w20: R1.2 4722.09,1172.91 4745.87,1149.13 U1.6
NetR2_2: R2.2 U1.5
NetR4_1: R4.1 R17.1 U3.12 | length 277
  Top Layer w10: R4.1@2645,1168.46 R4.1@2650,1163.46
  Top Layer w15: R17.1@2485,1247.2 2526.56,1205.65 2604.81,1205.65 2641.99,1168.46 R4.1@2645,1168.46
  Top Layer w20: U3.12 R4.1@2650,1163.46
NetR5_1: R5.1 R6.2 | length 85
  Top Layer w20: R5.1@2463.11,401.89 R6.2@2463.11,486.89
NetR6_1: R6.1 R7.2 | length 85
  Top Layer w20: R6.1@2384.37,486.89 R7.2@2384.37,571.89
NetR11_1: R11.1 R12.2
NetR12_1: R12.1 R13.2
NetR18_1: R18.1 U7.1
NetR18_2: R18.2 U7.8
NetR19_1: R19.1 R20.2
NetR20_1: R20.1 R21.2
NetR25_1: R25.1 R26.2 | length 85
  Top Layer w20: R25.1@2863.11,401.89 R26.2@2863.11,486.89
NetR26_1: R26.1 R27.2 | length 85
  Top Layer w20: R26.1@2784.37,486.89 R27.2@2784.37,571.89
NetR28_2: R28.2 R31.1 U3.10 | length 280
  Top Layer w15: R31.1 2786.55,1210.02 2877.81,1210.02 R28.2@2915,1247.2
  Top Layer w20: U3.10 R31.1@2750,1163.46
NetR32_2: R32.2 R72.2 R85.2 R98.2 U7.5 U8.5 U9.5 U10.5 | length 242.8
  Top Layer w20: U10.5 2120.12,540 2151.93,571.81 2171.18,571.81 R98.2@2214.37,615
NetR33_1: R33.1 R34.2 | length 85
  Top Layer w20: R33.1@3268.11,396.89 R34.2@3268.11,481.89
NetR34_1: R34.1 R35.2 | length 85
  Top Layer w20: R34.1@3189.37,481.89 R35.2@3189.37,566.89
NetR39_1: R39.1 R40.2 | length 85
  Top Layer w20: R39.1@3339.37,396.89 R40.2@3339.37,481.89
NetR40_1: R40.1 R41.2 | length 85
  Top Layer w20: R40.1@3418.11,481.89 R41.2@3418.11,566.89
NetR42_2: R42.2 R45.1 U4.12
NetR47_1: R47.1 R48.2
NetR48_1: R48.1 R49.2
NetR53_1: R53.1 R54.2
NetR54_1: R54.1 R55.2
NetR56_2: R56.2 R59.1 U4.10
NetR60_1: R60.1 U2.16
NetR64_1: R64.1 U8.1
NetR64_2: R64.2 U8.8
NetR65_2: R65.2 U7.6
NetR68_1: R68.1 R69.1 U5.12
NetR71_1: R71.1 U9.1
NetR71_2: R71.2 U9.8
NetR77_1: R77.1 U10.1
NetR77_2: R77.2 U10.8
NetR78_2: R78.2 U8.6
NetR81_1: R81.1 R82.2 U5.10
NetR91_2: R91.2 U9.6
NetR94_1: R94.1 R95.2 U6.12
NetR96_2: R96.2 U11.50
NetR97_2: R97.2 U11.40
NetR104_2: R104.2 U10.6 | length 225.7
  Top Layer w20: 1950,625 R104.2 ; 1955,625 1940,610 1940,505 1955,490 U10.6
NetR107_1: R107.1 R108.2 U6.10
R\E\S\E\T\: J8.10 U11.39 | length 947.5
  Top Layer w10: J8.10 330,2575 v1(375,2620) ; U11.39 1069.53,2629.53 1080,2640 v1(1080,2650)
  Bottom Layer w10: v1(375,2620) 395,2620 425,2650 v1(1080,2650)
TCK: J8.4 J8.7 R89.1 U11.53 | length 1619.5
  Top Layer w10: J8.7 162.5,2625 175,2637.5 175,2833.13 R89.1 ; 177.5,2725 J8.4 337.5,2725 v1(362.5,2700) ; U11.53 1153.6,2453.84 1151.48,2455.97 1151.48,2477.56 1155,2481.08 v1(1155,2700)
  Bottom Layer w10: v1(362.5,2700) v1(1155,2700)
TCK_DSP: J3.48 J5.9 J5.11
TDI: J8.8 R83.1 U11.33 | length 994.7
  Top Layer w10: J8.8 337.5,2625 362.5,2650 402.5,2650 437.5,2685 ; R83.1 412.5,2825 437.5,2800 437.5,2685 ; U11.33 877.64,2747.64 877.5,2747.5 500,2747.5 437.5,2685
TDI_DSP: J3.97 J5.3
TDO: J8.6 R84.1 U11.49 | length 1389.3
  Top Layer w10: J8.6 v1(387.5,2675) 412.5,2700 412.5,2737.5 325,2825 R84.1 ; U11.49 1074.86,2430.04 1105,2460.18 v1(1105,2675)
  Bottom Layer w10: v1(387.5,2675) v1(1105,2675)
TDO_DSP: J3.98 J5.7
TMS: J8.2 R90.1 U11.51 | length 1324.9
  Top Layer w10: 237.5,2787.5 R90.1 ; J8.2 337.5,2775 v1(387.5,2725) ; U11.51 1114.23,2431.73 1130,2447.5 v1(1130,2725) v1@1125,2725
  Bottom Layer w10: v1(387.5,2725) v1(1130,2725)
TMS_DSP: J3.49 J5.1
TRSTN: J3.99 J5.2
VIN: C2.1 C3.1 J1.7 J1.8 J1.15 J2.7 J2.8 J2.15 U1.2 | length 2394.7
  Top Layer w30: U1.2 4914.13,949.13 ; 4930,933.27 4914.13,949.13 ; 4945,930 4945,425 4970,400 4995,400 5040,445 5040,492.09 C3.1 5047.91,921.73 5021.5,948.14 5021.5,1047.13 5196.89,1222.52 J1.15 5142.36,1380.91 J1.7 4990.91,1380.91 4936.38,1326.38 4936.38,971.38 4914.13,949.13
pads on no net: *.1 *.2 *.3 *.4 *.5 *.6 *.7 *.8 *.9 *.10 *.11 *.12 *.13 *.14 *.15 *.16 *.17 *.18 *.19 *.20 *.21 *.22 *.23 *.24 *.25 *.26 *.27 *.28 *.29 *.30 *.31 *.32 *.33 *.34 *.35 *.36 *.37 *.38 *.39 *.40 *.41 *.42 *.43 *.44 *.45 *.46 *.47 *.48 *.49 *.50 *.51 *.52 *.53 *.54 *.55 *.56 *.57 *.58 *.59 *.60 *.61 *.62 *.63 *.64 *.65 *.66 *.67 *.68 *.69 *.70 J1.2 J1.3 J1.10 J1.11 J2.3 J2.11 J3.3 J3.4 J3.5 J3.15 J3.16 J3.17 J3.18 J3.19 J3.20 J3.21 J3.22 J3.23 J3.24 J3.25 J3.26 J3.28 J3.29 J3.30 J3.31 J3.32 J3.33 J3.34 J3.35 J3.36 J3.38 J3.39 J3.40 J3.41 J3.42 J3.44 J3.45 J3.46 J3.53 J3.54 J3.55 J3.65 J3.66 J3.67 J3.68 J3.69 J3.70 J3.71 J3.72 J3.73 J3.74 J3.75 J3.76 J3.78 J3.79 J3.80 J3.81 J3.83 J3.84 J3.85 J3.86 J3.88 J3.89 J3.90 J3.91 J3.94 J3.95 J3.101 J3.102 J5.5 J5.6 U2.3 U2.15 U2.28 U11.1 U11.3 U11.4 U11.5 U11.6 U11.9 U11.10 U11.11 U11.13 U11.14 U11.15 U11.16 U11.19 U11.20 U11.21 U11.22 U11.23 U11.25 U11.26 U11.27 U11.28 U11.29 U11.30 U11.34 U11.35 U11.36 U11.37 U11.38 U11.41 U11.42 U11.43 U11.44 U11.47 U11.48 U11.52 U11.55 U11.56 U11.57 U11.59 U11.61 U11.62 U11.63

## Polygon pours and split planes (outlines as drawn)
AGND on Top Layer "GND" (solid, pour order 20): 4645,1250 4670,1225 4670,850 4625,805 4625,450 4600,425 4175,425 4149.21,450.79 4149.21,1124.21 4160,1135 4275,1250
+5V on Top Layer "GND" (solid, pour order 5): 4260,1330 4180,1330 3975,1125 3975,50 4585,50 4630,95 4630,315 4595,350 4080,350 4030,400 4030,635 4050,655 4050,1120 4050.79,1120.79
VIN on Top Layer "GND" (solid, pour order 11): 4970,400 4995,400 5040,445 5040,919.64 5045,924.64 5021.5,948.14 5021.5,1047.13 5196.89,1222.52 5196.89,1326.38 5142.36,1380.91 4995,1380.91 4990.91,1380.91 4936.38,1326.38 4936.38,971.38 4914.13,949.13 4930,933.27 4930,440
NetC1_2 on Top Layer "GND" (solid, pour order 15): 4785,890 4790,895 4880,895 4880,100 4835,55 4795,55 4740,110 4740,690 4785,735
GND_ISO on Bottom Layer "GND" (solid, pour order 6): 1970.75,5132.37 1943.25,5104.87 1943.25,4072.37 418.25,4072.37 40.75,4449.87 55.75,4464.87 55.75,5472.37

## Silkscreen, mask and mechanical layers (free items; w line width, h text height)
Top Overlay:
  circle w10: c196.85,3129.92 r137.8
  circle w10: c196.85,177.17 r137.8
  circle w10: c5196.85,177.17 r137.8
  circle w10: c5196.85,3129.92 r137.8
Drill Drawing:
  lines w10: 0,570.87 5393.7,570.87 ; 0,2736.22 5393.7,2736.22 ; 196.85,177.17 5196.85,177.17 ; 196.85,3129.92 5196.85,3129.92 ; 796.85,0 796.85,177.17 ; 796.85,3129.92 796.85,3307.09 ; 996.85,0 996.85,177.17 ; 996.85,3129.92 996.85,3307.09 ; 1196.85,0 1196.85,177.17 ; 1196.85,3129.92 1196.85,3307.09 ; 1396.85,0 1396.85,177.17 ; 1396.85,3129.92 1396.85,3307.09 ; 1596.85,0 1596.85,177.17 ; 1596.85,3129.92 1596.85,3307.09 ; 1796.85,0 1796.85,177.17 ; 1796.85,3129.92 1796.85,3307.09 ; 1996.85,0 1996.85,177.17 ; 2196.85,0 2196.85,177.17 ; 2396.85,0 2396.85,177.17 ; 3196.85,0 3196.85,177.17 ; 3241.85,4049.92 3241.85,4227.09 ; 3396.85,0 3396.85,177.17 ; 3441.85,4049.92 3441.85,4227.09 ; 3531.85,3134.92 3531.85,3312.09 ; 3596.85,0 3596.85,177.17 ; 3596.85,3129.92 3596.85,3307.09 ; 3796.85,0 3796.85,177.17 ; 3796.85,3129.92 3796.85,3307.09 ; 3996.85,0 3996.85,177.17 ; 3996.85,3129.92 3996.85,3307.09 ; 4111.85,4059.92 4111.85,4237.09 ; 4176.85,4054.92 4176.85,4232.09 ; 4196.85,0 4196.85,177.17 ; 4196.85,3129.92 4196.85,3307.09 ; 4396.85,0 4396.85,177.17 ; 4396.85,3129.92 4396.85,3307.09 ; 4596.85,0 4596.85,177.17 ; 4596.85,3129.92 4596.85,3307.09 ; 0,0 0,3307.09 5393.7,3307.09 5393.7,0 0,0 ; 2596.85,0 2596.85,177.17 2596.85,0 ; 2796.85,0 2796.85,177.17 2796.85,0 ; 2996.85,0 2996.85,177.17 2996.85,0 ; 3641.85,4049.92 3641.85,4227.09 3641.85,4049.92 ; 3841.85,4049.92 3841.85,4227.09 3841.85,4049.92 ; 4041.85,4049.92 4041.85,4227.09 4041.85,4049.92

## Dimensions
0,0 to 5393.7,0 on Drill Drawing
0,0 to 196.85,177.17 on Drill Drawing
0,0 to 196.85,177.17 on Drill Drawing
0,3307.09 to 0,0 on Drill Drawing
196.85,3129.92 to 196.85,177.17 on Drill Drawing
196.85,177.17 to 5196.85,177.17 on Drill Drawing

## Text inside footprints (layer, text, board x,y; h text height)
J1: Top Overlay "9" at 5240,2048.54 h59.06 r270; Top Overlay "15" at 5250,1331.04 h59.06 r270; Top Overlay "8" at 5055,1198.54 h59.06 r270; Top Overlay "1" at 4985,2006.04 h59.06
J2: Top Overlay "1" at 410,1301.04 h59.06 r180; Top Overlay "8" at 340,2108.54 h59.06 r90; Top Overlay "15" at 145,1976.04 h59.06 r90; Top Overlay "9" at 155,1258.54 h59.06 r90
J3: Top Overlay "50" at 3852.5,1485 h40; Top Overlay "100" at 3820,1710 h40; Top Overlay "73" at 2350,1715 h40; Top Overlay "24" at 2397.5,1490 h40; Top Overlay "71" at 2205,1712.5 h40; Top Overlay "22" at 2250,1485 h40; Top Overlay "57" at 1355,1712.5 h40; Top Overlay "7" at 1392.5,1557.5 h40; Top Overlay "55" at 1200,1717.5 h40; Top Overlay "6" at 1252.5,1487.5 h40; Top Overlay "51" at 867.5,1715 h40; Top Overlay "1" at 907.5,1532.5 h40
J5: Top Overlay "2" at 4870,2295 h50 r270; Top Overlay "1" at 4770,2295 h50 r270; Top Overlay "14" at 4870,1495 h50 r270; Top Overlay "13" at 4770,1495 h50 r270